# Altium PCB FilthyDirtyPWMDriverWithPot.PcbDoc
Units mm, origin at the board's own origin, x right, y up, seen from the top; angles counter-clockwise.
Board outline 22 x 22 mm, 2 copper layers (Top Layer, Bottom Layer); 8 components, 8 nets, 23 pads, 1 vias.
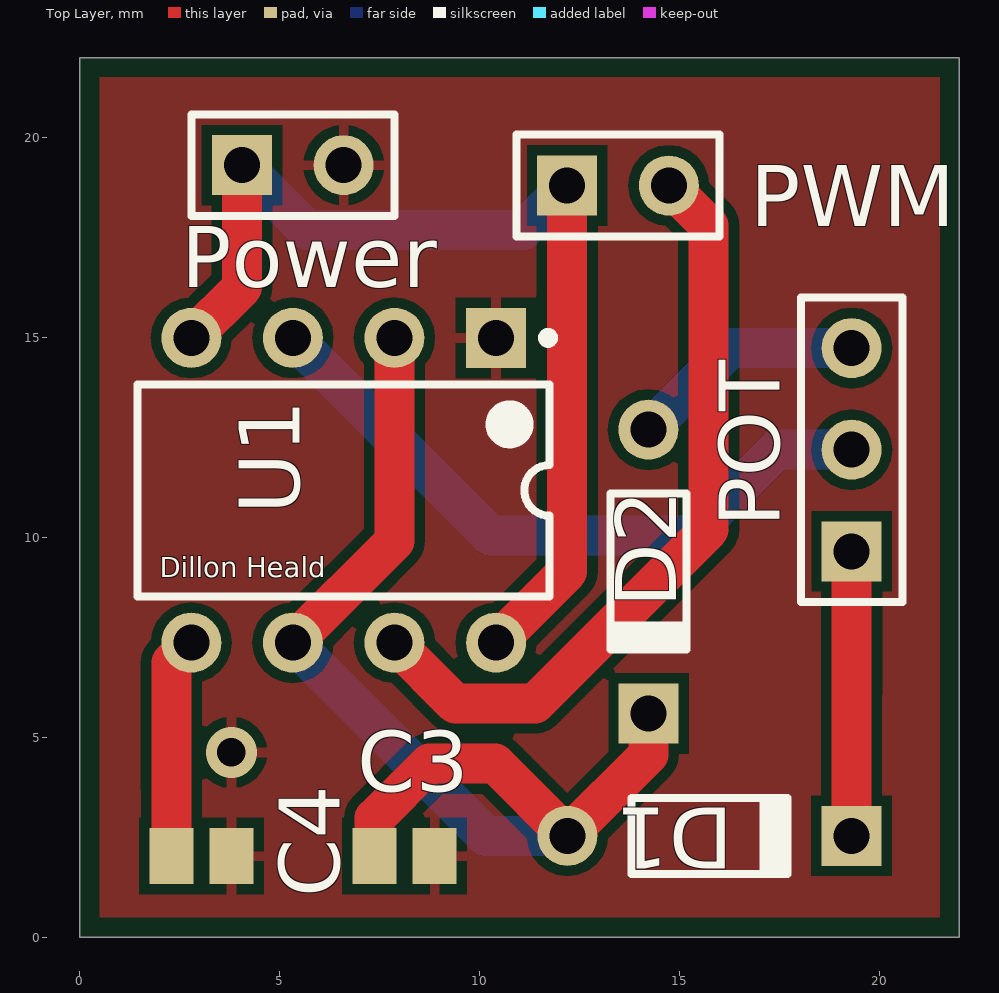
[diagram p0: Top Layer view]
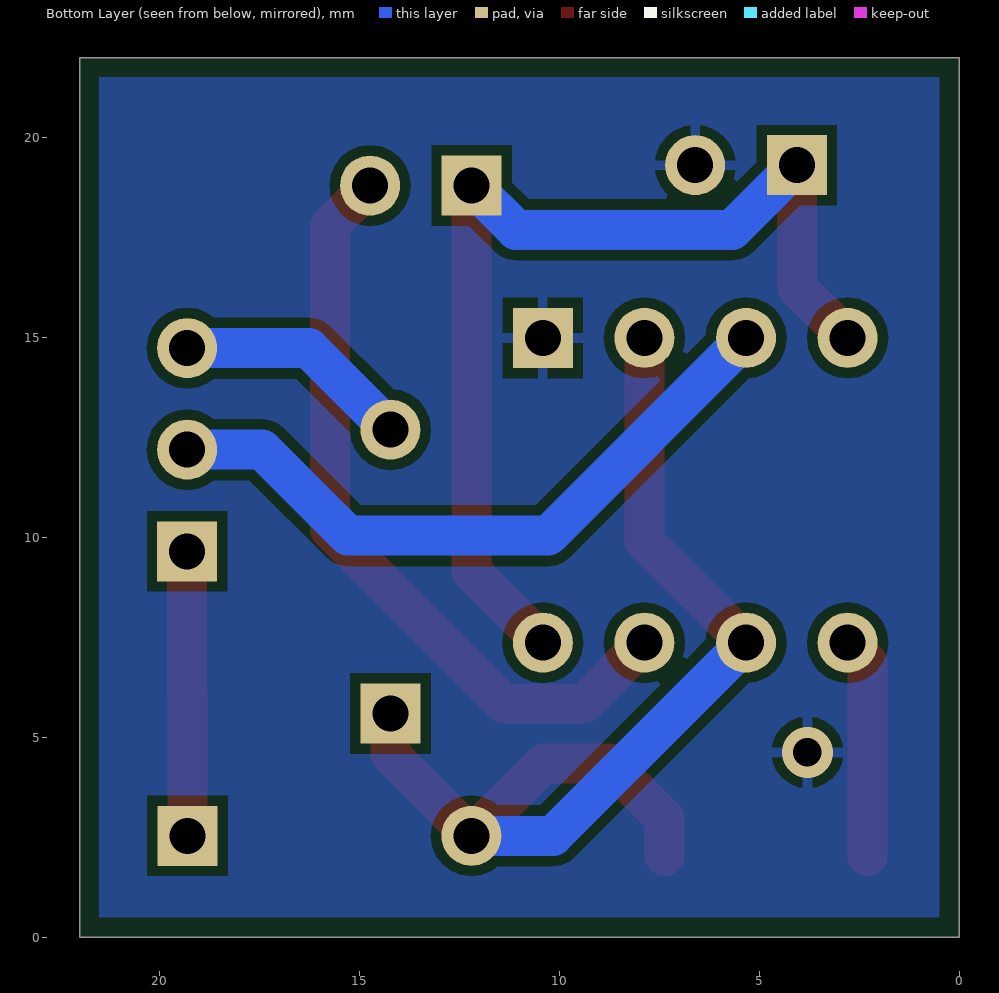
[diagram p1: Bottom Layer view, seen from below]

## Layer stack, top to bottom
Top Solder: solder mask 0.0102, Solder Resist, Dk 3.5
Top Layer: signal copper 0.0356
Dielectric 1: dielectric 0.32, FR-4, Dk 4.8
Bottom Layer: signal copper 0.0356
Bottom Solder: solder mask 0.0102, Solder Resist, Dk 3.5

## Board outline
0,0 21.996,0 21.996,21.996 0,21.996

## Design rules (kind name [scope] priority, off if disabled: settings)
Clearance [All] p1: gap=0.254
PolygonConnect [All] p1: connectstyle=Relief reliefconductorwidth=0.254 reliefentries=4 polygonreliefangle="90 Angle" airgapwidth=0.254
RoomDefinition DirtyPWM [InComponentClass('DirtyPWM')] p1: confinementstyle=ConfineIn formatcopy=TRUE lockcomponents=FALSE outline 0,0 21.844,0 21.844,21.844 0,21.844
RoutingVias [All] p1: holewidth=0.711 width=1.27 viastyle="Through Hole" minholewidth=0.711 minwidth=1.27 maxholewidth=0.711 maxwidth=1.27
SolderMaskExpansion [All] p1: expansion=0.102
Width [All] p1: maxlimit=1.2 minlimit=0.4 preferedwidth=1
30 further rules are at their usual default settings.

## Components (designator, comment, footprint, x,y, rotation, side; value= is the part's Value field where it differs from the comment)
C3 "Cap Pol3" C0805 8.128,2.032 r0 top
C4 "Cap Pol3" C0805 3.048,2.032 r0 top
D1 "Diode 1N4148" DO-35 15.748,2.54 r0 top
D2 "Diode 1N4148" DO-35 14.224,9.144 r270 top
POT "Header 3" HDR1X3 19.304,9.652 r90 top
Power "Header 2" HDR1X2 4.064,19.304 r0 top
PWM "Header 2" HDR1X2 12.192,18.796 r0 top
U1 "LM555CN/NOPB" N08E 6.604,11.176 r270 top

## Footprints (in the part's own frame and the unit in brackets; to place one, negate y for a bottom-side part, rotate by r counter-clockwise, add the part's x,y. Pads: shape width x height; smd on the part's side, far side on the other; paste and mask are expansions set on the pad)
C0805 [mm] "Chip Capacitor, Body 2.0x1.3mm, IPC High Density"
  rect 1.1x1.4 smd: 1(-0.75,0) 2(0.75,0)
  body extent -1.1,-0.72 1.1,0.72, height 1.4
DO-35 [mm] "Diode, Axial; Body 3.8 x 1.9 mm (LxDia. max), Lead Dia. 0.53 mm (max)"
  round 1.5 hole 0.9: 1(-3.55,0)
  rect 1.5x1.5 hole 0.9: 2(3.55,0)
  silkscreen extent -1.95,-0.95 2.05,0.95
HDR1X2 [mm] "Connector; Header; 2 Position"
  rect 1.5x1.5 hole 0.9: 1(0,0)
  round 1.5 hole 0.9: 2(2.54,0)
  silkscreen extent -1.27,-1.27 3.81,1.27
HDR1X3 [mm] "Connector; Header; 3 Position"
  rect 1.5x1.5 hole 0.9: 1(0,0)
  round 1.5 hole 0.9: 2(2.54,0) 3(5.08,0)
  silkscreen extent -1.27,-1.27 6.35,1.27
N08E [mm] "DIP, 8-Pin, Row Spacing 7.62 mm, Pitch 2.54 mm"
  rect 1.5x1.5 hole 0.9: 1(-3.81,3.81)
  round 1.5 hole 0.9: 2(-3.81,1.27) 3(-3.81,-1.27) 4(-3.81,-3.81) 5(3.81,-3.81) 6(3.81,-1.27) 7(3.81,1.27) 8(3.81,3.81)
  silkscreen extent -3.93,-5.15 2.65,5.24, body extent -3.6,-5.15 3.6,5.15, height 5.33

## Part data
C3 C4: "Polarized Capacitor (Surface Mount)"
D1 D2: "High Conductance Fast Diode"
POT: "Header, 3-Pin"
Power PWM: "Header, 2-Pin"
U1: library part CMP-0056-00016-2, "Timer, 8-pin MDIP, Pb-Free"

## Via types
v1: diameter 1.27, hole 0.711, Top Layer to Bottom Layer, 1 vias

## Nets (pads, with @x,y where several pads share a name; then routed paths per layer and width w, separated by ;. In a path a pad name is that pad's centre, name@x,y a point inside that pad or via, vN(x,y) a via of type N, cw(c..) or ccw(c..) an arc to the next point about the centre after c; other vN are vias at no path point)
GND: C3.2 C4.2 Power.2 U1.1
  other v1: 3.798,4.624
NetC3_1: C3.1 D1.1 D2.2 U1.2 U1.6 | length 28.5
  Top Layer w1: U1.6 7.874,9.906 U1.2 ; C3.1 7.378,2.98 8.75,4.352 10.386,4.352 D1.1 14.224,4.566 D2.2
  Bottom Layer w1: U1.6 10.16,2.54 D1.1
NetC4_1: C4.1 U1.5 | length 5.5
  Top Layer w1: C4.1 2.298,3.687 2.294,3.691 2.294,6.866 U1.5
NetD1_2: D1.2 POT.1 | length 7.1
  Top Layer w1: D1.2 19.298,6.079 19.304,6.085 POT.1
NetD2_1: D2.1 POT.3 | length 5.9
  Bottom Layer w1: D2.1 16.262,14.732 POT.3
NetPOT_2: POT.2 U1.3 | length 16.9
  Bottom Layer w1: U1.3 10.279,10.041 15.282,10.041 17.433,12.192 POT.2
NetPWM_2: PWM.2 U1.7 | length 19.3
  Top Layer w1: U1.7 9.395,5.845 11.382,5.845 15.731,10.194 15.731,17.797 PWM.2
VCC: Power.1 PWM.1 U1.4 U1.8 | length 26.3
  Top Layer w1: U1.4 4.064,16.256 Power.1 ; U1.8 12.192,9.144 PWM.1
  Bottom Layer w1: Power.1 5.681,17.687 11.083,17.687 PWM.1

## Polygon pours and split planes (outlines as drawn)
GND on Top Layer "Bottom Layer-No Net" (solid, pour order 2): 0.5,0.5 21.5,0.5 21.5,21.5 0.5,21.5 0.5,0.5
GND on Bottom Layer "Bottom Layer-No Net" (solid, pour order 0): 0.5,0.5 0.5,21.5 21.5,21.5 21.5,0.5 0.5,0.5

## Silkscreen, mask and mechanical layers (free items; w line width, h text height)
Top Overlay:
  text "Dillon Heald" at 2,9 h0.5
Mechanical 1:
  the board outline again, w0.254